# EAGLE board Brilliant Bruticus-Migelo (EAGLE 9.7.0)

Size 151.53 x 88.71 mm. Coordinates in mm from the lower left corner, seen from the top.
Outline: 0,0 151.53,0 151.53,88.71 0,88.71 0,0
Copper layers (1*16): Top 0.035mm / dielectric 1.5mm / Bottom 0.035mm
Design rules "default": minimum track width 6mil, minimum drill 0.35mm, track to track 6mil, track to pad 6mil, pad to pad 6mil, via to via 6mil, smd to smd 6mil, copper to edge 40mil, drill to drill 6mil, minimum pad ring 10mil, minimum via ring 8mil, stop-mask expansion 4mil, vias tented up to drill 0mil, thermal gap 10mil

## Footprints (pad centres in the part's own frame; a part is rotated, then mirrored left to right if it is on the bottom)
LEDRD254W60D565H860B = drill 0.981 pad 1.581: 1 -1.27,0; 2 1.27,0
BATTERY-GENERIC = drill 1.118 pad 3.15 octagon: + 2.54,0; - -2.54,0
RESAD1016W63L850D250B = drill 0.83 pad 1.43: 1 -5.08,0; 2 5.08,0
SWITCH-MOMENTARY-PTH-6.5MM = drill 1.016 pad 1.88: 1 -3.251,2.261; 2 3.251,2.261; 3 -3.251,-2.261; 4 3.251,-2.261

## Placement (x,y rotation side)
D1  RED  [LEDRD254W60D565H860B]  122.79,20.68 180 top
P1  BATTERYGENERIC  [BATTERY-GENERIC]  8.26,80.45 180 top
R1  100  [RESAD1016W63L850D250B]  122.93,58.85 0 top
R2  1k  [RESAD1016W63L850D250B]  98.33,25.94 90 top
R3  100  [RESAD1016W63L850D250B]  145.2,26.94 90 top
R4  1k  [RESAD1016W63L850D250B]  117.95,6.33 0 top
R5  100  [RESAD1016W63L850D250B]  73.07,60.18 0 top
R6  1k  [RESAD1016W63L850D250B]  72.74,31.26 90 top
S1  SWITCH_MOMENTARY  [SWITCH-MOMENTARY-PTH-6.5MM]  106.65,76.75 90 top

## Library data of the parts
D1 = Tinkercad; CATEGORY: Opto-Electronic; SUB-CATEGORY: LED; VALUE: LED_RED
P1 R1-R6 S1 = Tinkercad

## Nets
D1_A: D1.1 R3.1
D1_C: D1.2 R4.2
P1+: P1.+ R5.1
P1-: P1.- R2.1 R4.1 R6.1 S1.3 S1.4
R5_2: R1.1 R2.2 R5.2 R6.2
S1_1: R1.2 R3.2 S1.1

## Tracks (layer width: path | path; a pad name or v marks a point on that pad's centre or on a via)
D1_A  (1 unrouted)
D1_C  (1 unrouted)
P1+  (1 unrouted)
P1-  (5 unrouted)
R5_2  (3 unrouted)
S1_1  (2 unrouted)